# EAGLE board brain_v01 (EAGLE 9.5.2)
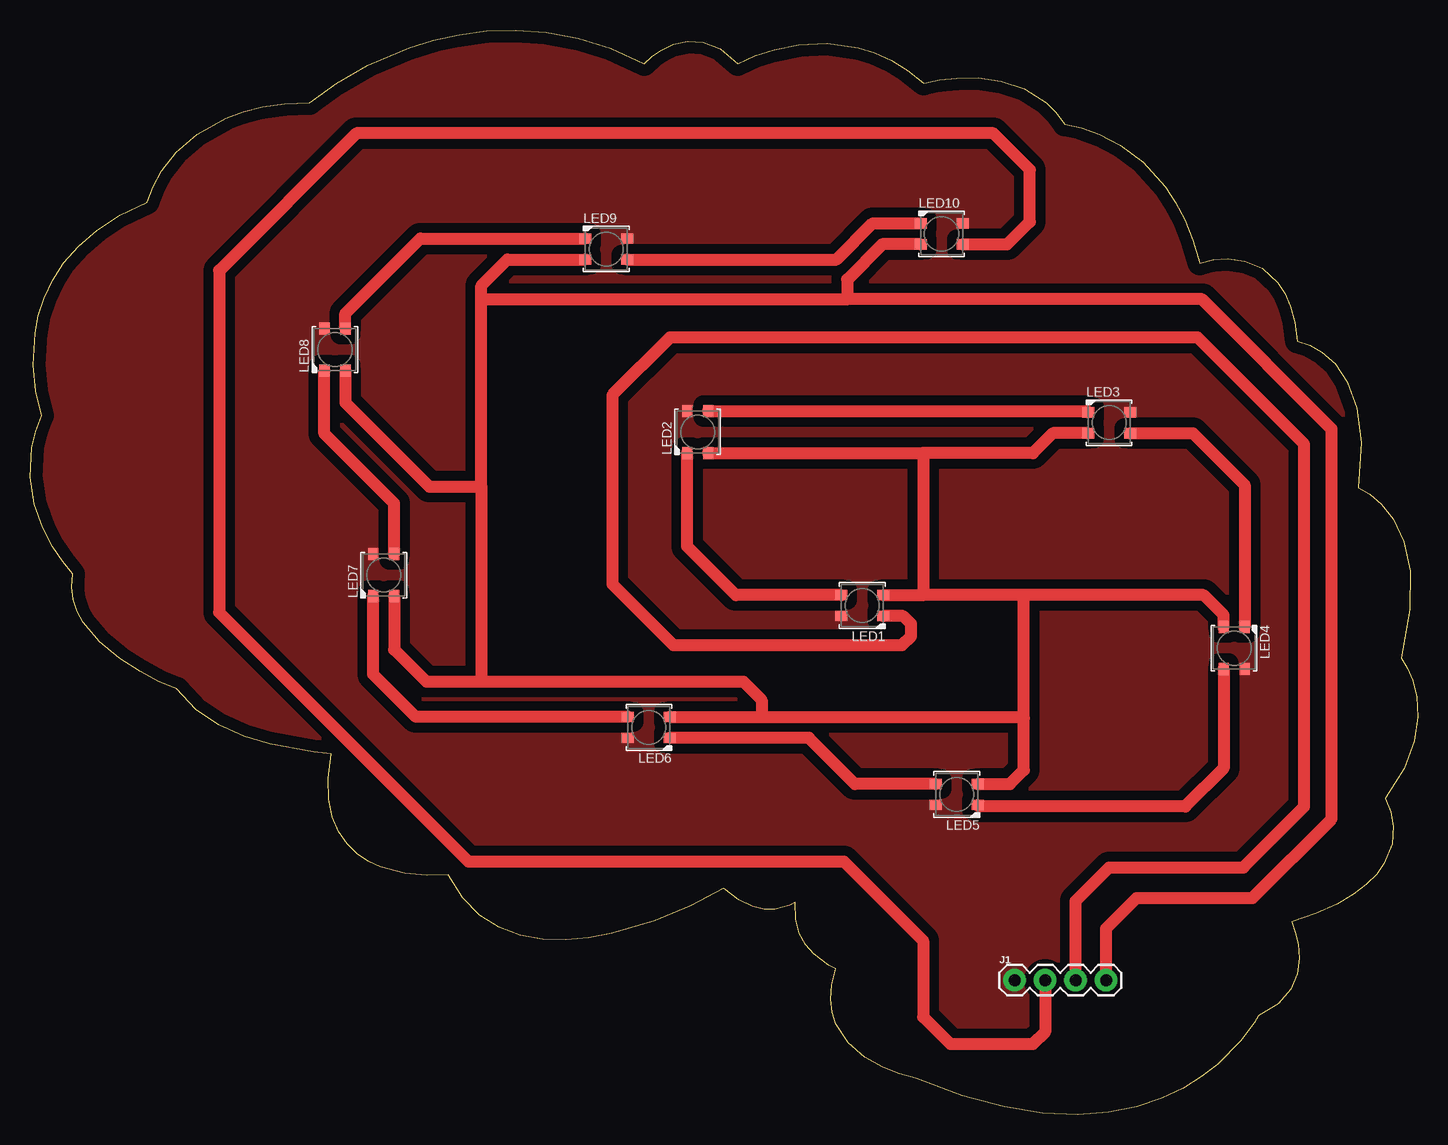
[diagram p0: board, top side]

Size 115.66 x 90.43 mm. Coordinates in mm from the lower left corner, seen from the top.
Outline: 34.87,20.01 33.04,19.94 31.22,20.11 29.19,20.66 28.19,21.13 27.26,21.75 26.42,22.56 25.73,23.58 25.21,24.81 24.9,26.3 24.85,28.05 25.09,30.09 23.58,30.22 20,30.89 17.86,31.55 15.74,32.5 13.8,33.8 12.21,35.48 10.7,36.13 9.18,36.93 7.47,38.03 5.81,39.4 4.45,41.05 3.95,41.97 3.62,42.95 3.49,43.99 3.58,45.09 2.71,46.13 1.89,47.34 1.05,48.95 0.36,50.9 0,53.14 0.14,55.63 0.46,56.94 0.97,58.3 0.49,60.32 0.27,62.5 0.42,65.17 0.71,66.61 1.18,68.08 1.88,69.56 2.82,71.02 4.05,72.43 5.6,73.76 7.49,74.98 9.77,76.07 10.26,77.36 11,78.7 12.19,80.22 13.93,81.75 16.3,83.08 17.75,83.61 19.39,84.02 21.24,84.29 23.3,84.38 25.54,85.99 28.16,87.47 31.61,88.94 33.61,89.56 35.76,90.05 38.06,90.35 40.49,90.43 43.03,90.24 45.67,89.75 48.39,88.89 51.17,87.64 51.84,88.23 52.62,88.76 53.62,89.23 54.8,89.5 56.12,89.43 57.54,88.86 58.99,87.64 60.4,88.28 62,88.8 64.05,89.21 66.43,89.32 69.03,88.94 70.39,88.52 71.75,87.9 73.12,87.07 74.48,86.01 75.81,86.28 77.25,86.43 79,86.44 80.93,86.18 82.87,85.53 84.68,84.37 85.49,83.56 86.22,82.59 87.61,82.29 89.09,81.76 90.86,80.83 92.76,79.4 94.61,77.36 95.46,76.08 96.23,74.6 96.91,72.92 97.46,71.01 98.62,71.28 99.83,71.36 101.23,71.18 102.68,70.57 104,69.36 104.56,68.48 105.03,67.39 105.39,66.07 105.61,64.49 106.63,64.16 107.64,63.59 108.75,62.6 109.78,61.08 110.57,58.92 110.92,56.02 110.67,52.27 111.66,51.73 112.62,50.92 113.62,49.64 114.48,47.8 115,45.32 114.99,42.11 114.26,38.09 114.79,37.24 115.22,36.22 115.56,34.85 115.66,33.14 115.36,31.14 114.51,28.87 112.95,26.35 113.4,25.25 113.61,24.05 113.5,22.56 112.83,20.91 112.21,20.05 111.37,19.2 110.27,18.36 108.88,17.55 107.18,16.79 105.13,16.08 105.45,15.18 105.67,14.21 105.76,13.02 105.6,11.74 105.06,10.44 104.02,9.25 102.36,8.26 102.01,7.66 100.9,6.16 98.96,4.2 97.65,3.18 96.1,2.22 94.3,1.37 92.24,0.68 89.91,0.2 87.3,0 84.39,0.13 81.19,0.64 77.67,1.59 73.83,3.04 72.44,3.41 71.07,3.95 69.58,4.79 68.19,5.99 67.16,7.58 66.86,8.55 66.74,9.63 66.82,10.83 67.15,12.17 66.56,12.46 65.3,13.41 64.65,14.17 64.12,15.13 63.79,16.3 63.78,17.71 63.32,17.46 62.07,17.12 61.2,17.13 60.19,17.37 59.06,17.92 57.83,18.85 55.04,17.42 52.07,16.18 48.49,15.1 46.58,14.74 44.65,14.56 42.73,14.62 40.87,14.95 39.11,15.61 37.5,16.64 36.07,18.09 34.87,20.01
Copper layers (1*16): Top 0.035mm / dielectric 0.15mm / Bottom 0.035mm
Design rules "default": minimum track width 6mil, minimum drill 0.35mm, track to track 6mil, track to pad 6mil, pad to pad 6mil, via to via 6mil, smd to smd 6mil, copper to edge 40mil, drill to drill 6mil, minimum pad ring 10mil, minimum via ring 8mil, stop-mask expansion 4mil, vias tented up to drill 0mil, thermal gap 10mil

## Footprints (pad centres in the part's own frame; a part is rotated, then mirrored left to right if it is on the bottom)
1X04 = drill 1.016 pad 1.88: 1 0,0; 2 2.54,0; 3 5.08,0; 4 7.62,0
LED3535 = smd 1 x 0.85: 1 -1.75,0.875; 2 -1.75,-0.875; 3 1.75,-0.875; 4 1.75,0.875

## Placement (x,y rotation side)
FRAME1  FRAME-LETTER  [CREATIVE_COMMONS]  -80.25,1.05 0 top  (outside the outline)
J1  [1X04]  82.06,11.21 0 top
LED1  WS2812B3535  [LED3535]  69.36,42.45 180 top
LED2  WS2812B3535  [LED3535]  55.64,56.93 90 top
LED3  WS2812B3535  [LED3535]  89.93,57.69 0 top
LED4  WS2812B3535  [LED3535]  100.34,38.89 270 top
LED5  WS2812B3535  [LED3535]  77.23,26.7 180 top
LED6  WS2812B3535  [LED3535]  51.58,32.29 180 top
LED7  WS2812B3535  [LED3535]  29.48,44.99 90 top
LED8  WS2812B3535  [LED3535]  25.41,63.78 90 top
LED9  WS2812B3535  [LED3535]  48.02,72.17 0 top
LED10  WS2812B3535  [LED3535]  75.96,73.44 0 top

## Library data of the parts
FRAME1 = SparkFun-Aesthetics
J1 = SparkFun-Connectors; PROD_ID: CONN-09696
LED1-LED10 = adafruit

## Nets
5V: J1.4 LED1.2 LED2.2 LED3.2 LED4.2 LED5.2 LED6.2 LED7.2 LED8.2 LED9.2 LED10.2
DI: J1.3 LED1.1
DO: J1.2 LED10.3
GND: J1.1 LED1.4 LED2.4 LED3.4 LED4.4 LED5.4 LED6.4 LED7.4 LED8.4 LED9.4 LED10.4
N$1: LED1.3 LED2.1
N$2: LED2.3 LED3.1
N$3: LED3.3 LED4.1
N$4: LED4.3 LED5.1
N$5: LED6.3 LED7.1
N$6: LED7.3 LED8.1
N$7: LED8.3 LED9.1
N$8: LED9.3 LED10.1
N$9: LED5.3 LED6.1

## Tracks (layer width: path | path; a pad name or v marks a point on that pad's centre or on a via)
5V
  Top 1.016: 74.44,55.15 74.44,43.32 | 56.54,55.15 LED2.2 74.41,55.18 74.44,55.15 | LED4.2 99.47,41.66 97.8,43.32 82.82,43.32 | 82.82,43.32 74.44,43.32 | LED5.2 81.66,27.57 82.82,28.73 82.82,33.05 | 82.82,33.05 82.82,43.32 | LED6.2 60.97,33.16 | 60.97,33.16 82.7,33.16 82.82,33.05 | LED7.2 30.35,38.78 33.03,36.1 37.61,36.1 | 37.61,36.1 59.45,36.1 60.97,34.57 60.97,33.16 | LED8.2 26.29,59.35 33.29,52.35 37.61,52.35 | 37.61,52.35 37.61,36.1 | LED1.2 74.44,43.32 | LED3.2 85.24,56.81 83.58,55.15 74.44,55.15 | J1.4 89.68,15.52 92.22,18.06 101.87,18.06 108.47,24.67 108.47,57.18 97.68,67.97 68.09,67.97 | 37.61,67.97 68.09,67.97 | 68.09,67.97 68.09,69.63 71.02,72.56 LED10.2 | 37.61,52.35 37.61,67.97 | 37.61,67.97 37.61,69.12 39.78,71.29 LED9.2
DI
  Top 1.016: LED1.1 72.77,41.57 73.42,40.92 73.42,39.91 72.66,39.15 53.61,39.15 48.53,44.23 48.53,59.97 53.35,64.8 97.3,64.8 106.19,55.91 106.19,25.68 101.11,20.6 89.93,20.6 87.14,17.81 J1.3
DO
  Top 1.016: LED10.3 81.43,72.56 83.33,74.45 83.33,78.77 80.28,81.82 27.19,81.82 15.76,70.39 15.76,41.89 36.54,21.11 67.83,21.11 74.44,14.51 74.44,8.16 76.72,5.87 83.58,5.87 84.6,6.89 J1.2
GND
  pour Top (isolate 0.813, no thermals): -0.24,-0.22 -0.24,93.76 114.06,93.76 117.87,93.76 117.87,-1.49 -0.24,-1.49
N$1
  Top 1.016: LED1.3 58.83,43.32 54.76,47.39 LED2.1
N$2
  Top 1.016: LED2.3 88.07,58.68 LED3.1
N$3
  Top 1.016: LED3.3 96.9,56.81 101.22,52.49 LED4.1
N$4
  Top 1.016: LED4.3 99.47,28.87 96.28,25.68 79.12,25.68 LED5.1
N$5
  Top 1.016: LED6.3 32.16,33.16 28.6,36.72 LED7.1
N$6
  Top 1.016: LED7.3 30.35,50.97 24.54,56.78 LED8.1
N$7
  Top 1.016: LED8.3 26.29,66.8 32.53,73.04 LED9.1
N$8
  Top 1.016: LED9.3 67.21,71.29 70.23,74.31 LED10.1
N$9
  Top 1.016: LED5.3 68.73,27.57 64.9,31.41 LED6.1